# Altium PCB HVPowerModule.PcbDoc (part 2 of 2)
Units mm, origin at the board's own origin, x right, y up, seen from the top; angles counter-clockwise.
Board outline 100 x 60 mm, 2 copper layers (Top Layer, Bottom Layer); 105 components, 66 nets, 450 pads, 567 vias.
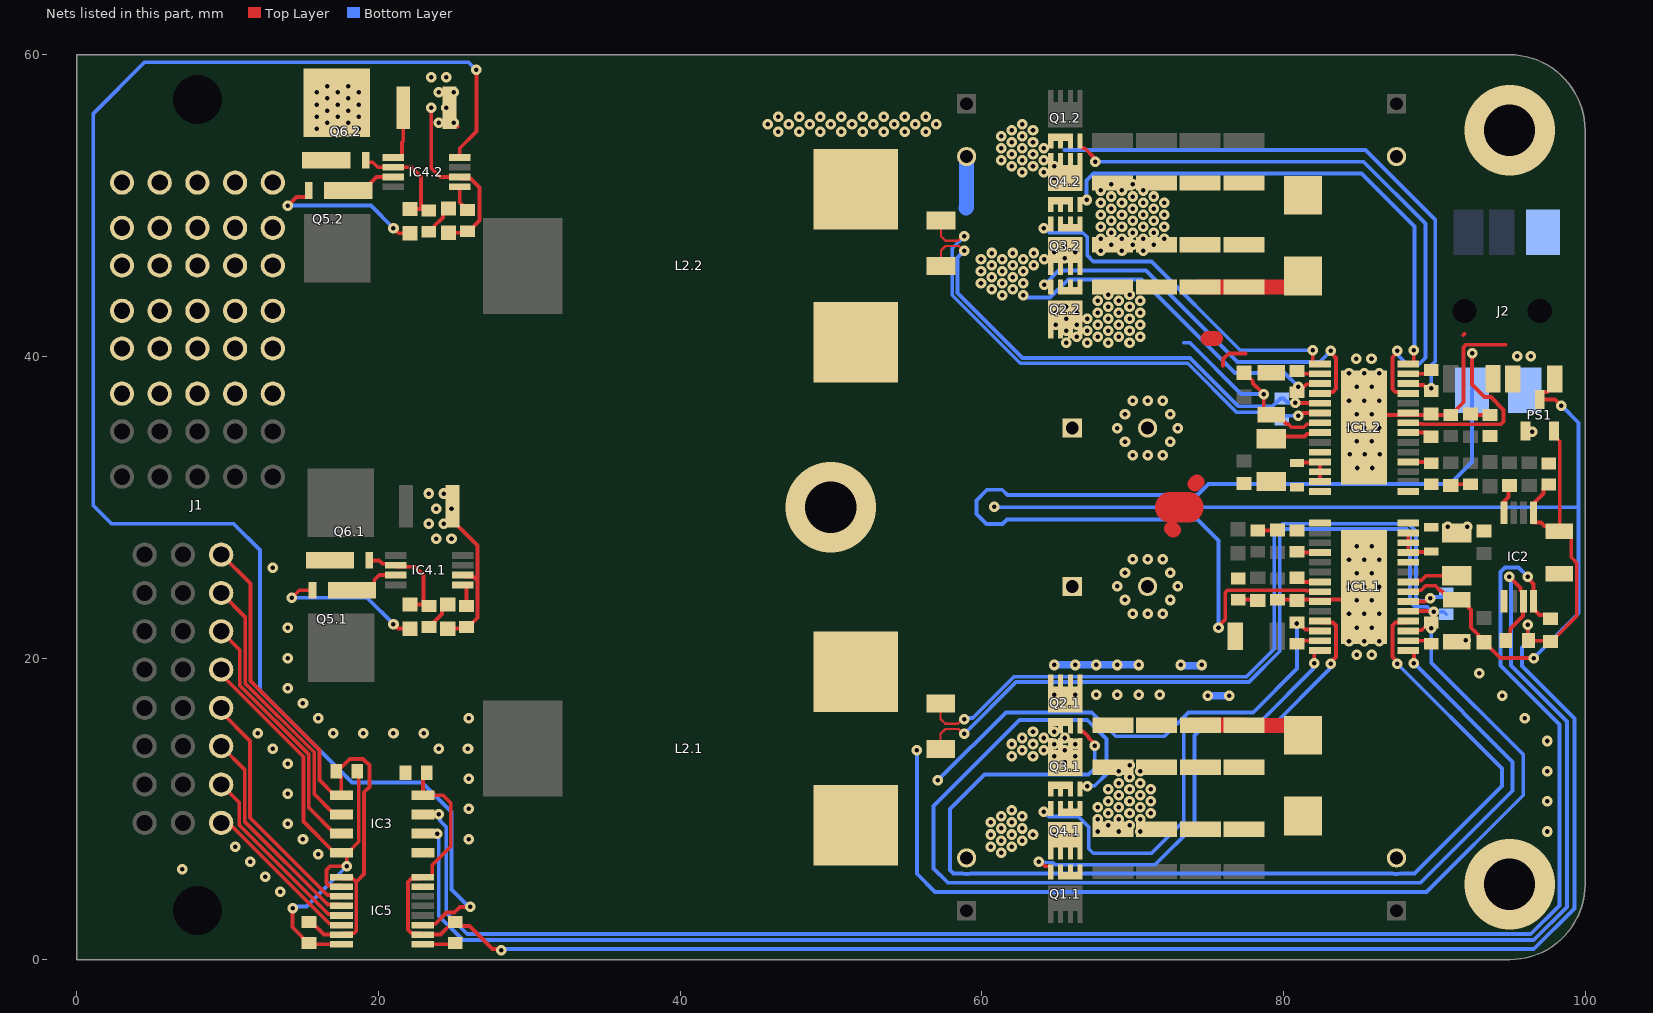
[diagram p2: the nets of this part, all layers, seen from the top]

## Via types
v1: diameter 0.7, hole 0.3, Top Layer to Bottom Layer, 564 vias
v2: diameter 6, hole 3.4, Top Layer to Bottom Layer, 3 vias

## Nets (pads, with @x,y where several pads share a name; then routed paths per layer and width w, separated by ;. In a path a pad name is that pad's centre, name@x,y a point inside that pad or via, vN(x,y) a via of type N, cw(c..) or ccw(c..) an arc to the next point about the centre after c; other vN are vias at no path point) (continued)
24VB_INJ: IC2.4 R10.2 | length 2
  Top Layer w0.254: IC2.4@94.525,29.638 94.623,29.736 94.623,30.37 94.925,30.672 94.925,31.375 R10.2@95,31.45
24VB_OUT: C29.2.2 IC4.2.1 J1.P1 Q6.2.5-6-7-8 | length 3.8
  Top Layer w0.254: IC4.2.1@20.973,53.195 21.46,53.195 21.558,53.293 21.558,54.197 21.645,54.283 C29.2.2@21.645,56.47
  other v1: 15.9,55.1 17.3,55.1 18.7,55.1 16.6,55.5 18,55.5 15.9,55.9 17.3,55.9 18.7,55.9 16.6,56.3 18,56.3 15.9,56.7 17.3,56.7 18.7,56.7 16.6,57.1 18,57.1 15.9,57.5 17.3,57.5 18.7,57.5 16.6,57.9 18,57.9
24VB_SHDN: IC4.2.8 IC5.11 | length 107.4
  Top Layer w0.254: IC5.11@22.95,2.298 23.041,2.389 23.785,2.389 24.515,3.119 25.033,3.119 25.414,3.5 v1(26.1,3.5) ; IC4.2.8@25.397,53.195 25.397,53.801 26.5,54.904 v1(26.5,59)
  Bottom Layer w0.254: v1(26.1,3.5) 26,3.5 24.856,4.644 24.856,9.79 22.896,11.75 18.25,11.75 12.146,17.854 12.146,27.154 10.4,28.9 2.3,28.9 1.1,30.1 1.1,56.1 4.5,59.5 25.966,59.5 26.466,59 v1(26.5,59)
EXT_3V3: C7.1 C32.2 IC3.1 IC5.1 IC5.7 J1.S17 | length 39.7
  Top Layer w0.254: J1.S17@9.58,26.875 11.523,24.932 11.523,18.477 16.1,13.9 16.1,11.906 17.1,10.905 IC3.1@17.538,10.905 17.538,12.162 17.3,12.4 17.3,12.5 18.1,13.3 19,13.3 19.081,13.219 19.085,13.219 19.4,12.904 19.4,11.446 19.054,11.1 19.054,5.677 18.527,5.15 18.529,5.148 18.529,1.901 18.38,1.753 17.641,1.753 IC5.7@17.55,1.662 16.388,1.662 15.6,2.45 C7.1@15.5,2.45 ; IC5.1@17.55,5.472 17.641,5.382 18.298,5.382 18.529,5.15
EXT_GND: C7.2 C32.1 IC3.4 IC5.2 IC5.8 J1.S20 | length 36
  Top Layer w0.254: J1.S20@9.58,19.235 9.58,18.91 15.032,13.458 15.032,9.163 17.1,7.095 IC3.4@17.538,7.095 IC3.4@17.702,7.095 ; v1@14.3,3.4 14.3,2.15 15.5,0.95 C7.2@15.6,0.95 ; C7.2@15.5,1.05 15.522,1.028 IC5.8@17.55,1.028 ; IC5.2@17.55,4.838 17.46,4.929 16.699,4.929 16.55,5.077 16.55,5.95 16.8,6.2 v1(17.9,6.2) 17.9,6.897 IC3.4@17.702,7.095 ; C32.1@18.7,12.4 18.698,12.398 18.698,7.818 17.975,7.095 IC3.4@17.702,7.095
  Bottom Layer w0.254: v1@14.207,3.526 15.226,3.526 v1(17.9,6.2)
  other v1: 14.307,3.426
EXT_SCL: IC3.3 J1.S19 | length 17
  Top Layer w0.254: J1.S19@9.58,21.795 J1.S19@9.58,21.775 10.811,20.544 10.811,18.182 15.388,13.605 15.388,10.077 17.1,8.365 IC3.3@17.538,8.365
EXT_SDA: IC3.2 J1.S18 | length 18.3
  Top Layer w0.254: J1.S18@9.58,24.335 J1.S18@9.58,24.315 11.167,22.728 11.167,18.329 15.744,13.753 15.744,10.991 17.1,9.635 IC3.2@17.538,9.635
GATE1.1: Q5.1.4 R24.1.2 | length 10.3
  Top Layer w0.254: v1(14.25,24) 14.75,24.5 Q5.1.4@15.63,24.5 ; v1(21,22.25) 21.3,21.95 R24.1.2@22.1,21.95
  Bottom Layer w0.254: v1(14.25,24) 19.25,24 v1(21,22.25)
GATE1.2: Q5.2.4 R24.2.2 | length 10.8
  Top Layer w0.254: v1(14,50) 14.577,50.577 15.257,50.577 15.38,50.7 Q5.2.4@15.38,51 ; v1(21,48.5) 21.33,48.17 R24.2.2@22.085,48.17
  Bottom Layer w0.254: v1(14,50) 19.5,50 v1(21,48.5)
GATE2.1: C28.1.2 IC4.1.2 Q6.1.4 R24.1.1 | length 7.3
  Top Layer w0.254: Q6.1.4@19.405,26.475 20.036,26.475 20.263,26.248 21.055,26.248 IC4.1.2@21.153,26.15 21.251,26.052 22.448,26.052 23,25.5 23,23.7 C28.1.2@23.15,23.55 ; R24.1.1@22.1,23.55 C28.1.2@23.15,23.55 ; C28.1.2@23.35,23.45 23.25,23.45 C28.1.2@23.15,23.55
GATE2.2: C28.2.2 IC4.2.2 Q6.2.4 R24.2.1 | length 7.8
  Top Layer w0.254: Q6.2.4@19.155,53.225 Q6.2.4@19.155,52.993 19.278,52.87 19.63,52.87 19.955,52.545 22.205,52.545 22.835,51.915 22.835,49.77 ; R24.2.1@22.085,49.77 22.835,49.77 ; C28.2.2@23.335,49.67 23.235,49.77 22.835,49.77
GND: C1.1.2 C1.2.2 C2.1.1 C2.2.1 C3.1.1 C3.2.1 C4.1.1 C4.2.1 C5.1.1 C5.2.1 C6.1.2 C6.2.2 C8.1.2 C8.2.2 C9.2 C10.1.1 C10.2.1 C11.1 C12.1.1 C12.2.1 C13.1.1 C13.2.1 C14.1 C15.1.2 C15.2.2 C16.1.1 C16.2.1 C19.1.1 C19.2.1 C20.1.1 C20.2.1 C21.1.1 C21.2.1 C22.1.2 C22.2.2 C23.1.2 C23.2.2 C24.1.2 C24.2.2 C25.1 C26.1 C26.1.1 C26.2.1 C27.1.1 C27.2.1 C29.1.1 C29.2.1 C35.1.2 C35.2.2 IC1.1.10 IC1.1.14 IC1.1.15 IC1.1.23 IC1.1.29 IC1.2.10 IC1.2.14 IC1.2.15 IC1.2.23 IC1.2.29 IC2.5 IC3.5 IC4.1.6 IC4.2.6 IC5.9 IC5.15 J1.P2 J2.1 J2.4 PS1.1 Q3.1.5 Q3.1.6 Q3.1.7 Q3.2.5 Q3.2.6 Q3.2.7 Q4.1.5 Q4.1.6 Q4.1.7 Q4.2.5 Q4.2.6 Q4.2.7 R3.2 R5.1.1 R5.2.1 R6.2 R25.1.1 R25.2.1 R30.1.1 R30.2.1 | length 60.6
  Top Layer w0.254: IC5.9@22.95,1.028 24.978,1.028 C9.2@25,1.05 ; v1(23.5,56.5) 23.5,52.5 24.105,51.895 IC4.2.6@25.397,51.895 25.495,51.797 26.104,51.797 26.202,51.699 26.204,51.699 26.338,51.565 26.338,51.562 26.7,51.201 26.7,49 26,48.3 C27.2.1@25.9,48.3 25.8,48.2 R25.2.1@24.65,48.2 ; R25.1.1@24.6,21.95 25.75,21.95 C27.1.1@25.85,22.05 25.95,22.05 26.569,22.669 26.569,23.909 ; C29.2.1@24.725,56.47 24.725,55.52 C29.2.1@24.873,55.372 ; C29.1.1@24.905,30.075 24.905,29.125 26.569,27.461 26.569,25.167 26.569,23.935 ; v1(25,55.5) 25,55.245 25.005,55.25 25.25,55.25 ; IC4.1.6@25.577,25.5 25.675,25.402 26.284,25.402 26.382,25.304 26.384,25.304 26.518,25.17 26.518,25.167 26.544,25.142 ; 76,39.4 76,39.82 76.38,40.2 77.5,40.2 ; C20.1.1@78.3,28.45 79.55,28.45 R3.2@79.6,28.5 ; C19.1.1@79.602,23.873 82.427,23.873 84.502,23.873 v1(85.352,24.723) ; v1(85.352,35.273) 86.202,36.123 88.277,36.123 89.802,36.123 91.202,36.123 91.465,36.386 91.465,36.486 91.939,36.96 91.939,40.596 92.12,40.777 94.723,40.777 ; R6.2@91.1,31.45 91.173,31.523 C20.2.1@92.402,31.523 ; 91.923,41.423 92,41.5
  Top Layer w1: 72.4,29.9 72.5,30 ; 72.6,28.6 72.7,28.5 ; 74.129,31.533 74.262,31.667 ; 75,41.2 75.5,41.2
  Top Layer w2: 72.5,30 73.7,30
  Bottom Layer w0.5: v1@73.217,19.5 v1@74.583,19.5 ; v1@75.092,17.5 v1(76.4,17.5)
  Bottom Layer w1: 58.95,49.83 59,49.88 C6.2.2@59,53.25
  other v1: 13.5,4.5 12.5,5.5 7,6 11.5,6.5 16,7 10.5,7.5 15,8 26,8 67.7,8.5 69.1,8.5 70.5,8.5 97.5,8.5 68.4,8.9 69.8,8.9 14,9 67.7,9.3 69.1,9.3 70.5,9.3 68.4,9.7 69.8,9.7 71.2,9.7 26,10 67.7,10.1 69.1,10.1 70.5,10.1 68.4,10.5 69.8,10.5 71.2,10.5 97.5,10.5 69.1,10.9 70.5,10.9 14,11 68.4,11.3 69.8,11.3 71.2,11.3 69.1,11.7 70.5,11.7 26,12 69.8,12.1 69.1,12.5 70.5,12.5 97.5,12.5 69.8,12.9 14,13 13,14 24,14 25.94,14 97.5,14.5 12,15 17,15 19,15 21,15 23,15 16,16 26,16 96,16 15,17 75,17.5 94.5,17.5 14,18 93,19 73.2,19.541 74.6,19.541 14,20 84.852,20.223 85.852,20.223 84.352,21.123 85.352,21.123 86.352,21.123 92.1,21.178 14,22 84.852,22.023 85.852,22.023 84.352,22.923 85.352,22.923 86.352,22.923 70,22.95 71,22.95 72,22.95 84.852,23.823 85.852,23.823 69.5,23.85 72.5,23.85 84.352,24.723 86.352,24.723 69,24.75 73,24.75 84.852,25.623 85.852,25.623 69.5,25.65 72.5,25.65 13,26 84.352,26.523 85.352,26.523 86.352,26.523 70,26.55 71,26.55 72,26.55 84.852,27.423 85.852,27.423 23.847,27.908 24.847,27.908 90.9,28.7 92.2,28.7 23.347,28.908 24.347,28.908 23.847,29.908 24.847,29.908 23.347,30.908 24.347,30.908 84.9,32.6 85.9,32.6 70,33.45 71,33.45 72,33.45 84.4,33.5 85.4,33.5 86.4,33.5 69.5,34.35 72.5,34.35 84.852,34.373 85.852,34.373 96.5,35 69,35.25 73,35.25 84.352,35.273 86.352,35.273 69.5,36.15 72.5,36.15 84.852,36.173 85.852,36.173 70,37.05 71,37.05 72,37.05 84.352,37.073 85.352,37.073 86.352,37.073 84.852,37.973 85.852,37.973 84.352,38.873 85.352,38.873 86.352,38.873 84.843,39.844 85.843,39.844 95.5,40 96.4,40 67.9,47 69.3,47 70.7,47 68.6,47.4 70,47.4 71.4,47.4 67.9,47.8 69.3,47.8 70.7,47.8 72.1,47.8 68.6,48.2 70,48.2 71.4,48.2 67.9,48.6 69.3,48.6 70.7,48.6 72.1,48.6 68.6,49 70,49 71.4,49 67.9,49.4 69.3,49.4 70.7,49.4 72.1,49.4 68.6,49.8 70,49.8 71.4,49.8 67.9,50.2 69.3,50.2 70.7,50.2 72.1,50.2 68.6,50.6 70,50.6 71.4,50.6 67.9,51 69.3,51 70.7,51 68.6,51.4 70,51.4 24,55.5 24.5,56.5 24,57.5 25,57.5 23.5,58.5 24.5,58.5
  other v2: 95,5 95,55
HDRV1.1: IC1.1.4 Q2.1.8 | length 72
  Top Layer w0.254: Q2.1.8@66.525,15.51 66.525,15.18 66.568,15.137 66.72,15.137 67.08,14.778 67.08,14.715 67.498,14.297 v1(67.498,14.176) ; v1(87.552,19.623) 87.552,19.744 87.225,20.071 87.225,22.158 87.417,22.35 88.179,22.35 IC1.1.4@88.277,22.448
  Bottom Layer w0.254: v1(67.498,14.176) 67.498,12.698 67.077,12.277 60.177,12.277 57.9,10 57.9,5.958 58.066,5.792 58.14,5.718 58.739,5.718 ccw(c59,6.75) 59.261,5.718 87.239,5.718 ccw(c87.5,6.75) 87.761,5.718 88.693,5.718 94.5,11.525 94.5,12.675 v1(87.552,19.623)
HDRV1.2: IC1.2.4 Q2.2.8 | length 26.1
  Top Layer w0.254: IC1.2.4@82.427,37.548 82.525,37.646 83.287,37.646 83.5,37.859 83.5,39.904 83.152,40.252 v1(83.152,40.373)
  Bottom Layer w0.254: v1(64.153,44.754) 65.099,45.7 70.9,45.7 76.968,39.632 82.411,39.632 v1(83.152,40.373)
HDRV2.1: IC1.1.25 Q1.1.8 | length 33.7
  Top Layer w0.254: v1(63.769,6.495) 63.89,6.495 64.192,6.193 64.532,6.193 64.575,6.15 Q1.1.8@64.575,5.82 ; IC1.1.25@82.427,22.448 82.525,22.35 83.287,22.35 83.479,22.158 83.479,20.071 83.152,19.744 v1(83.152,19.623)
  Bottom Layer w0.254: v1(63.769,6.495) 64.627,6.427 64.746,6.427 64.879,6.293 71.493,6.293 74.1,8.9 74.1,14.858 74.642,15.4 79.2,15.4 83.067,19.267 83.067,19.538 v1(83.152,19.623)
HDRV2.2: IC1.2.25 Q1.2.8 | length 40.8
  Top Layer w0.254: Q1.2.8@66.525,54.28 66.525,53.95 66.678,53.797 66.83,53.797 67.44,53.188 67.44,52.985 v1(67.525,52.9) ; v1(87.549,40.373) 87.549,40.252 87.348,40.051 87.348,40.048 87.225,39.925 87.225,37.838 87.417,37.646 88.179,37.646 IC1.2.25@88.277,37.548
  Bottom Layer w0.254: v1(67.525,52.9) 85.325,52.9 89.425,48.8 89.425,39.913 89.01,39.498 88.177,39.498 87.634,40.041 87.634,40.288 v1(87.549,40.373)
LDRV1.1: IC1.1.1 Q3.1.8 | length 76.1
  Top Layer w0.254: IC1.1.1@88.277,20.498 88.553,20.498 88.651,20.4 v1(88.651,19.669)
  Bottom Layer w0.254: v1(67,11.5) 67.032,11.532 67.494,11.532 68.275,12.314 68.275,14.625 67,15.9 62.5,15.9 56.8,10.2 56.8,6.058 57.758,5.1 89.1,5.1 95.2,11.2 95.2,13.12 v1(88.651,19.669)
LDRV1.2: IC1.2.1 Q3.2.8 | length 23.2
  Top Layer w0.254: v1(81.95,40.409) 81.95,39.596 82.048,39.498 IC1.2.1@82.427,39.498
  Bottom Layer w0.254: v1(64.106,48.482) 64.195,48.482 64.477,48.2 66.7,48.2 67.002,47.898 67.002,46.698 67.4,46.3 71.25,46.3 77.141,40.409 v1(81.95,40.409)
LDRV2.1: IC1.1.28 Q4.1.8 | length 30
  Top Layer w0.254: v1(82.053,19.669) 82.053,20.4 82.151,20.498 IC1.1.28@82.427,20.498
  Bottom Layer w0.254: v1(64.1,9.8) 64.172,9.8 64.472,9.5 66.4,9.5 67.1,8.8 67.1,7.355 67.395,7.06 71.26,7.06 73.4,9.2 73.4,15.258 74.042,15.9 78.6,15.9 81.968,19.268 81.968,19.583 v1(82.053,19.669)
LDRV2.2: IC1.2.28 Q4.2.8 | length 34.2
  Top Layer w0.254: IC1.2.28@88.277,39.498 88.652,39.498 88.648,39.502 v1(88.648,40.409)
  Bottom Layer w0.254: v1(66.957,50.37) 66.957,51.657 67.418,52.118 85.182,52.118 88.698,48.602 88.698,40.459 v1(88.648,40.409)
LSN.1: C34.1.1 IC1.1.6 L2.1.2 R1.1.2 | length 50.7
  Top Layer w0.15: R1.1.2@57.275,16.5 57.275,15.963 57.589,15.649 58.434,15.649 58.735,15.95 v1(58.85,15.95)
  Top Layer w0.254: IC1.1.6@88.277,23.748 89.403,23.748 89.625,23.969 v1(89.745,23.969)
  Bottom Layer w0.254: v1(58.85,15.95) 58.935,16.035 59.403,16.035 62.131,18.764 77.564,18.764 79.4,20.6 79.4,28.341 79.961,28.902 88.301,28.902 88.8,28.403 88.8,23.949 88.949,23.8 89.455,23.8 89.692,24.037 90.537,24.037 C34.1.1@90.8,24.3
LSN.2: C34.2.1 IC1.2.6 L2.2.2 R1.2.2 | length 34.8
  Top Layer w0.15: R1.2.2@57.3,48.6 57.3,47.968 57.595,47.673 58.433,47.673 58.735,47.975 v1(58.85,47.975)
  Top Layer w0.254: v1(81,36.077) 81.121,36.077 81.288,36.244 82.235,36.244 82.329,36.15 IC1.2.6@82.427,36.248
  Bottom Layer w0.254: v1(58.85,47.975) 58.044,47.169 58.044,44.053 62.553,39.544 73.656,39.544 76.9,36.3 79.3,36.3 79.8,35.8 C34.2.1@79.9,35.8 80.163,36.063 80.986,36.063 v1(81,36.077)
NetC17.1_1: C17.1.1 IC1.1.2 | length 1.6
  Top Layer w0.254: IC1.1.2@88.277,21.148 89.627,21.148 C17.1.1@89.802,20.973
NetC17.2_1: C17.2.1 IC1.2.2 | length 1.6
  Top Layer w0.254: C17.2.1@80.902,39.023 81.077,38.848 IC1.2.2@82.427,38.848
NetC18.1_2: C18.1.2 IC1.1.27 | length 1.6
  Top Layer w0.254: C18.1.2@80.902,20.973 81.077,21.148 IC1.1.27@82.427,21.148
NetC18.2_2: C18.2.2 IC1.2.27 | length 1.6
  Top Layer w0.254: IC1.2.27@88.277,38.848 89.627,38.848 C18.2.2@89.802,39.023
NetC21.1_2: C21.1.2 R4.1.1 | length 1.3
  Top Layer w0.254: C21.1.2@77.002,23.873 78.252,23.873 R4.1.1@78.302,23.823
NetC21.2_2: C21.2.2 R4.2.1 | length 1.3
  Top Layer w0.254: R4.2.1@92.402,36.173 92.452,36.123 C21.2.2@93.702,36.123
NetC23.1_1: C23.1.1 IC1.1.8 | length 3.4
  Top Layer w0.254: IC1.1.8@88.277,25.048 88.777,25.048 88.875,25.146 89.145,25.146 89.452,25.453 C23.1.1@91.502,25.453
NetC23.2_1: C23.2.1 IC1.2.8 | length 3.4
  Top Layer w0.254: C23.2.1@79.202,34.543 79.359,34.7 81.409,34.7 81.559,34.85 82.329,34.85 IC1.2.8@82.427,34.948
NetC24.1_1: C24.1.1 IC1.1.11 IC1.1.12 IC1.1.13 | length 2.8
  Top Layer w0.254: IC1.1.13@88.277,28.298 IC1.1.12@88.277,27.648 88.277,27.073 88.314,27.036 89.765,27.036 C24.1.1@89.802,27.073
NetC24.2_1: C24.2.1 IC1.2.11 IC1.2.12 IC1.2.13 | length 2.8
  Top Layer w0.254: C24.2.1@80.902,32.923 80.94,32.961 82.39,32.961 82.427,32.923 IC1.2.12@82.427,32.348 IC1.2.13@82.427,31.698
NetC26.1_2: C26.1.2 IC1.1.18 | length 1.6
  Top Layer w0.254: C26.1.2@80.902,27.073 80.977,26.998 IC1.1.18@82.427,26.998
NetC26.2_2: C26.2.2 IC1.2.18 | length 1.6
  Top Layer w0.254: IC1.2.18@88.277,32.998 89.727,32.998 C26.2.2@89.802,32.923
NetC27.1_2: C27.1.2 IC4.1.5 | length 1.6
  Top Layer w0.254: IC4.1.5@25.577,24.85 25.752,24.85 25.85,24.752 C27.1.2@25.85,23.45
NetC27.2_2: C27.2.2 IC4.2.5 | length 1.8
  Top Layer w0.254: IC4.2.5@25.397,51.245 25.397,50.203 25.537,50.063 25.537,49.963 25.8,49.7 C27.2.2@25.9,49.7
NetC28.1_1: C28.1.1 R25.1.2 | length 2.1
  Top Layer w0.254: C28.1.1@23.35,22.05 23.45,22.05 23.713,22.313 23.713,22.413 24.227,22.927 24.227,23.202 24.575,23.55 R25.1.2@24.6,23.55
NetC28.2_1: C28.2.1 R25.2.2 | length 2.1
  Top Layer w0.254: C28.2.1@23.335,48.27 23.435,48.27 23.698,48.533 23.698,48.633 24.277,49.212 24.277,49.452 24.625,49.8 R25.2.2@24.65,49.8
NetIC1.1_21: IC1.1.21 R5.1.2 | length 1.6
  Top Layer w0.254: R5.1.2@80.902,25.323 81.177,25.048 IC1.1.21@82.427,25.048
NetIC1.2_21: IC1.2.21 R5.2.2 | length 1.6
  Top Layer w0.254: IC1.2.21@88.277,34.948 89.527,34.948 R5.2.2@89.802,34.673
NetIC2_7: IC2.7 IC3.6 R19.1 | length 110.5
  Top Layer w0.254: R19.1@94.75,21.15 95.048,21.448 95.048,21.948 95.897,22.797 95.897,23.734 IC2.7@95.925,23.762 95.925,24.275 95.729,24.471 95.729,24.648 v1(94.983,25.394)
  Bottom Layer w0.254: v1(23.915,8.365) 24,8.28 24,2.9 25.6,1.3 96.6,1.3 98.8,3.5 98.8,15.8 95.1,19.5 95.1,25.079 95.062,25.117 95.062,25.315 v1(94.983,25.394)
NetIC2_8: IC2.8 IC3.7 R18.1 | length 111.4
  Top Layer w0.254: v1(96.2,25.4) 96.2,25.279 96.575,24.904 IC2.8@96.575,23.762 96.575,23.249 96.975,22.85 97.45,22.85 R18.1@97.7,22.6
  Bottom Layer w0.254: v1(24,9.635) 24.085,9.55 24.085,9.215 24.5,8.8 24.5,3.1 25.846,1.754 ; 25.9,1.7 96.4,1.7 98.3,3.6 98.3,15.6 94.399,19.501 94.399,25.715 94.684,26 95.6,26 v1(96.2,25.4)
NetIC4.1_3: IC4.1.3 Q5.1.1-2-3 Q6.1.1-2-3 | length 3.5
  Top Layer w0.254: Q5.1.1-2-3@18.25,24.5 19.3,24.5 19.723,24.923 19.723,25.164 20.06,25.5 IC4.1.3@21.153,25.5
NetIC4.2_3: IC4.2.3 Q5.2.1-2-3 Q6.2.1-2-3 | length 3.4
  Top Layer w0.254: Q5.2.1-2-3@18,51 19.05,51 19.473,51.423 19.473,51.489 19.879,51.895 IC4.2.3@20.973,51.895
NetIC5_3: IC5.3 J1.S21 | length 16.3
  Top Layer w0.254: J1.S21@9.58,16.695 9.58,16.42 11.49,14.51 11.49,9.41 16.608,4.293 17.46,4.293 IC5.3@17.55,4.202
NetIC5_4: IC5.4 J1.S22 | length 14.4
  Top Layer w0.254: J1.S22@9.58,14.155 11.134,12.601 11.134,9.166 16.642,3.658 17.46,3.658 IC5.4@17.55,3.568
NetIC5_5: IC5.5 J1.S23 | length 12.4
  Top Layer w0.254: J1.S23@9.58,11.615 10.778,10.417 10.778,8.922 16.678,3.023 17.46,3.023 IC5.5@17.55,2.932
NetIC5_6: IC5.6 J1.S24 | length 10.8
  Top Layer w0.254: J1.S24@9.58,9.075 9.838,8.816 10.335,8.816 16.763,2.389 17.46,2.389 IC5.6@17.55,2.298
SW1.1: C17.1.2 C34.1.2 IC1.1.3 IC1.1.5 Q2.1.5 Q2.1.6 Q2.1.7 Q3.1.1 Q3.1.2 Q3.1.3 Q3.1.4 R1.1.1 | length 118.9
  Top Layer w0.15: R1.1.1@57.275,13.975 57.275,14.976 57.6,15.301 58.465,15.301 58.782,14.984 v1(58.856,14.984)
  Top Layer w0.254: IC1.1.3@88.277,21.798 88.325,21.846 89.175,21.846 89.702,22.373 89.8,22.275 v1(89.8,21.99) ; IC1.1.5@88.277,23.098 88.3,23.121 89.91,23.121 v1(89.965,23.066)
  Bottom Layer w0.254: v1(55.7,13.9) 55.7,5.7 56.9,4.5 89.5,4.5 95.9,10.9 95.9,13.6 89.8,19.7 v1(89.8,21.99) ; v1(58.856,14.984) 62.279,18.408 77.711,18.408 79.756,20.453 79.756,28.193 80.109,28.546 88.154,28.546 88.4,28.3 88.4,23.729 88.729,23.4 89.516,23.4 89.85,23.066 90.634,23.066 C34.1.2@90.8,22.9
  other v1: 65.5,13.1 62,13.5 63.4,13.5 64.8,13.5 66.2,13.5 62.7,13.9 64.1,13.9 65.5,13.9 62,14.3 63.4,14.3 64.8,14.3 66.2,14.3 62.7,14.7 64.1,14.7 65.5,14.7 63.4,15.1 64.8,15.1
SW1.2: C17.2.2 C34.2.2 IC1.2.3 IC1.2.5 Q2.2.5 Q2.2.6 Q2.2.7 Q3.2.1 Q3.2.2 Q3.2.3 Q3.2.4 R1.2.1 | length 56.4
  Top Layer w0.15: 57.3,46.6 57.3,47.026 57.6,47.326 58.493,47.326 58.81,47.009 v1(58.856,47.009)
  Top Layer w0.254: v1(80.794,36.913) 80.802,36.906 82.419,36.906 IC1.2.5@82.427,36.898 ; C17.2.2@80.902,37.623 80.902,37.885 v1(81,37.983) ; C17.2.2@81.002,37.623 81.529,38.15 82.379,38.15 IC1.2.3@82.427,38.198
  Bottom Layer w0.254: v1(58.856,47.009) 58.4,46.554 58.4,44.2 62.7,39.9 73.803,39.9 77.003,36.7 79.3,36.7 79.8,37.2 C34.2.2@79.9,37.2 ; v1@62.753,43.9 64.535,43.9 65.735,45.1 70.6,45.1 76.8,38.9 80.083,38.9 v1(81,37.983) ; C34.2.2@80,37.2 80.263,36.937 80.77,36.937 v1(80.794,36.913)
  other v1: 61.353,44.054 62.753,44.054 60.653,44.454 62.053,44.454 59.953,44.854 61.353,44.854 62.753,44.854 60.653,45.254 62.053,45.254 59.953,45.654 61.353,45.654 62.753,45.654 60.653,46.054 62.053,46.054 63.453,46.054 59.953,46.454 61.353,46.454 62.753,46.454 64.153,46.454 65.5,46.5 60.653,46.854 62.053,46.854 63.453,46.854 64.8,46.9 66.2,46.9 65.5,47.3
SW2.1: C18.1.1 IC1.1.26 L2.1.1 Q1.1.5 Q1.1.6 Q1.1.7 Q4.1.1 Q4.1.2 Q4.1.3 Q4.1.4 | length 32.9
  Top Layer w0.254: v1(80.9,22.29) 80.969,22.29 81.014,22.336 81.454,21.896 82.329,21.896 IC1.1.26@82.427,21.798
  Bottom Layer w0.254: v1@57.108,11.908 61.6,16.4 67.3,16.4 68.889,14.811 72.111,14.811 73.7,16.4 78,16.4 80.9,19.3 v1(80.9,22.29)
  other v1: 61.3,7.1 60.6,7.5 62,7.5 61.3,7.9 62.7,7.9 60.6,8.3 62,8.3 63.4,8.3 64.8,8.3 66.2,8.3 61.3,8.7 62.7,8.7 60.6,9.1 62,9.1 61.3,9.5 62.7,9.5 62,9.9 57.087,11.887
SW2.2: C18.2.1 IC1.2.26 L2.2.1 Q1.2.5 Q1.2.6 Q1.2.7 Q4.2.1 Q4.2.2 Q4.2.3 Q4.2.4 | length 39.6
  Top Layer w0.254: IC1.2.26@88.277,38.198 88.375,38.1 89.3,38.1 89.5,37.9 v1(89.8,37.9) C18.2.1@89.8,37.7
  Bottom Layer w0.254: 65.5,53.677 85.448,53.677 90.075,49.05 90.075,39.674 89.8,39.399 v1(89.8,37.9)
  other v1: 64.8,51.8 62.7,52.2 64.1,52.2 62,52.6 63.4,52.6 64.8,52.6 61.3,53 62.7,53 64.1,53 62,53.4 63.4,53.4 61.3,53.8 62.7,53.8 64.1,53.8 62,54.2 63.4,54.2 61.3,54.6 62.7,54.6 46.5,54.9 47.9,54.9 49.3,54.9 50.7,54.9 52.1,54.9 53.5,54.9 54.9,54.9 56.3,54.9 62,55 63.4,55 45.8,55.4 47.2,55.4 48.6,55.4 50,55.4 51.4,55.4 52.8,55.4 54.2,55.4 55.6,55.4 57,55.4 62.7,55.4 46.5,55.9 47.9,55.9 49.3,55.9 50.7,55.9 52.1,55.9 53.5,55.9 54.9,55.9 56.3,55.9
SYNC: IC1.1.22 IC1.2.22 J2.5 | length 86.1
  Top Layer w0.254: v1(75.7,22) 75.7,22.121 76.145,22.565 76.145,24.343 76.293,24.492 81.482,24.492 81.511,24.463 82.362,24.463 IC1.1.22@82.427,24.398 ; IC1.2.22@88.277,35.598 88.342,35.533 89.193,35.533 89.222,35.504 94.422,35.504 94.6,35.682 94.6,36.456 93.756,37.3 93.333,37.3 92.5,38.133 92.5,40.179 v1(92.518,40.197)
  Bottom Layer w0.254: v1(75.7,22) 75.7,27.8 74.31,29.19 61.687,29.19 61.387,28.89 60.308,28.89 59.644,29.554 59.644,30.447 60.353,31.156 61.363,31.156 61.702,30.817 74.317,30.817 75.033,31.533 91.056,31.533 92.51,32.987 J2.5@92.51,37.755 92.518,37.763 v1(92.518,40.197)
V_IN: C1.1.1 C1.2.1 C2.1.2 C2.2.2 C3.1.2 C3.2.2 C4.1.2 C4.2.2 C5.1.2 C5.2.2 C11.2 C15.1.1 C15.2.1 C22.1.1 C22.2.1 IC1.1.7 IC1.2.7 J1.P3 PS1.3 Q2.1.1 Q2.1.2 Q2.1.3 Q2.1.4 Q2.2.1 Q2.2.2 Q2.2.3 Q2.2.4 R2.1.2 R2.2.2 | length 105.8
  Top Layer w0.254: R2.2.2@77.427,38.923 77.965,38.385 77.965,38.235 v1(78.7,37.5) 78.7,36.506 79.083,36.123 79.602,36.123 80.215,35.51 80.317,35.51 80.527,35.3 81.355,35.3 81.555,35.5 82.329,35.5 IC1.2.7@82.427,35.598 ; IC1.1.7@88.302,24.398 88.4,24.496 89.137,24.496 89.435,24.794 90.079,24.794 90.387,24.486 90.465,24.486 90.695,24.256 91.119,24.256 C22.1.1@91.502,23.873 91.902,23.873 92.285,23.49 92.285,23.342 92.448,23.179 92.448,22.009 92.739,21.718 92.739,21.707 92.927,21.519 92.927,21.398 93.275,21.05 R2.1.2@93.3,21.05 93.325,21.05 94.375,20 v1(96.6,20) ; C11.2@98,38.5 98,38.1 97.617,37.717 97.567,37.717 97.498,37.648 97.198,37.648 97,37.45 PS1.3@97,37.15 98.02,37.15 v1(98.43,36.74)
  Top Layer w1: C3.2.2@74.475,44.6 C2.2.2@77.375,44.6 77.385,44.61 80.582,44.61 C1.2.1@81.3,45.328 ; C4.1.2@74.5,15.55 C5.1.2@77.4,15.55 77.41,15.54 80.632,15.54 C1.1.1@81.3,14.872
  Bottom Layer w0.254: v1(60.831,30.023) 60.854,30 99.573,30 ; 73.4,40.9 73.8,40.9 77.2,37.5 v1(78.7,37.5) ; v1(96.6,20) 99.573,22.973 99.573,30 ; v1(98.43,36.74) 99.573,35.597 99.573,30
  Bottom Layer w0.5: v1(64.8,19.541) v1(66.2,19.541) ; v1@66.223,19.531 66.233,19.541 v1(67.6,19.541) ; v1@67.623,19.531 67.633,19.541 v1(69,19.541) ; v1@69.023,19.531 69.033,19.541 v1(70.4,19.541)
  other v1: 64.8,17.567 66.2,17.567 67.6,17.567 69,17.567 70.4,17.567 71.8,17.567 65.6,40.9 67,40.9 68.4,40.9 69.8,40.9 66.3,41.3 67.7,41.3 69.1,41.3 70.5,41.3 65.6,41.7 67,41.7 68.4,41.7 69.8,41.7 64.9,42.1 66.3,42.1 67.7,42.1 69.1,42.1 70.5,42.1 65.6,42.5 67,42.5 68.4,42.5 69.8,42.5 64.9,42.9 66.3,42.9 67.7,42.9 69.1,42.9 70.5,42.9 65.6,43.3 68.4,43.3 69.8,43.3 67.7,43.7 69.1,43.7 70.5,43.7 68.4,44.1 69.8,44.1
  other v2: 50,30
V_LDO: C9.1 C14.2 C25.2 C26.2 IC2.1 IC3.8 IC5.10 IC5.16 PS1.2 R18.2 R19.2 | length 137.2
  Top Layer w0.254: C26.2@23.005,12.495 C26.2@23.1,12.4 ; C26.2@23.2,12.4 22.962,12.162 IC3.8@22.962,10.905 24.295,10.905 24.8,10.4 24.8,7.5 23.573,6.273 23.573,5.563 23.483,5.472 IC5.16@22.95,5.472 22.859,5.382 22.202,5.382 21.971,5.15 21.971,1.986 22.204,1.753 22.859,1.753 IC5.10@22.95,1.662 24.112,1.662 24.9,2.45 C9.1@25.1,2.45 ; C9.1@25.1,2.5 25.363,2.237 26.039,2.237 27.567,0.708 28.048,0.708 v1(28.134,0.623) ; v1(96.2,22.2) 96.2,21.2 R19.2@96.25,21.15 97.825,21.15 99.456,22.781 99.456,26.31 99.083,26.683 99.083,28.017 98.7,28.4 C14.2@98.3,28.4 98.325,28.425 98.325,34.375 97.95,34.75 PS1.2@97.95,35.05 ; IC2.1@96.475,29.588 96.475,29.075 96.573,28.977 97.086,28.977 97.33,28.733 97.817,28.733 C14.2@98.2,28.35 ; IC2.1@96.475,29.638 96.475,30.151 97.237,30.913 97.237,31.237 97.5,31.5 C25.2@97.6,31.5
  Bottom Layer w0.254: v1(28.134,0.623) 28.211,0.7 96.603,0.7 99.3,3.397 99.3,16 95.823,19.477 95.823,20.69 96.2,21.067 v1(96.2,22.2)
pads on no net: IC1.1.16 IC1.1.17 IC1.2.16 IC1.2.17 IC2.2 IC2.6 IC4.1.7 IC4.2.7 J1.MH1 J1.MH2 J1.S1 J1.S2 J1.S3 J1.S4 J1.S5 J1.S6 J1.S7 J1.S8 J1.S9 J1.S10 J1.S11 J1.S12 J1.S13 J1.S14 J1.S15 J1.S16 J2.2 J2.3 J2.MH1 J2.MH2 L2.1.MP1 L2.2.MP1

## Polygon pours and split planes (outlines as drawn)
GND on Top Layer "GND_L01_P072" (solid, pour order 72): 76.373,40.373 73.4,37.4 73.4,22.6 76.427,19.573 99.7,19.573 99.7,40.373
GND on Top Layer "GND_L01_P061" (solid, pour order 61): 1,29 1,4 4,1 25.94,1 25.94,28.94 26,29
GND on Top Layer "Top Layer-GND" (solid, pour order 88): 64,7 86,7 92.7,0.3 95.287,0.3 99.7,4.713 99.7,19.4 76.3,19.4 73.2,22.5 73.2,37.4 76.3,40.5 99.7,40.5 99.7,55.287 95.287,59.7 92.7,59.7 86,53 64,53 64,46 78,46 80,44 74.8,44 60.8,30 74.909,15.891 79.932,15.932 78,14 64,14
V_IN on Top Layer "V_IN_L01_P065" (solid, pour order 65): 1,42 21,42 28,35 60,35 64,39 64,45 75.8,45 60.8,30 75.8,15 64,15 64,21 60,25 30,25 19,36 1,36
SW1.1 on Top Layer "SW1.1_L01_P024" (solid, pour order 24): 38,25 59,25 64,20 64,17 65,16 67,16 67,13 38,13
GND on Top Layer "GND_L01_P104" (solid, pour order 104): 91,41.3 91,40 99.7,40 99.7,41.3
GND on Top Layer "GND_L01_P105" (solid, pour order 105): 91,19.75 91,18.45 99.7,18.45 99.7,19.75
SW1.2 on Top Layer "SW1.2_L01_P064" (solid, pour order 64): 67,48 60,48 58,46 57,46 55,48 49,48 49,44 49,35 59,35 67,43 67,46
SW2.2 on Top Layer "SW2.2_L01_P063" (solid, pour order 63): 67,48 67,55 65,57 43,57 41,55 41,35 55,35 55,44 49,44 48,45 48,53 49,54 54,54 60,48
24V.1 on Top Layer "24V.1_L01_P036" (solid, pour order 36): 45,6 39,6 38,7 38,25 29,25 25,21 21.436,21 19.69,22.746 19.69,18.445 19.695,18.445 21.14,17 32,17 33,16 33,3 35.7,0.3 45,0.3
LSN.1 on Top Layer "LSN.1_L01_P022" (solid, pour order 22): 58.2,16.4 53.6,21 49,21 49,16.4
LSN.2 on Top Layer "LSN.2_L01_P066" (solid, pour order 66): 49,54 49,48.5 59,48.5 59,54
SW2.1 on Top Layer "SW2.1_L01_P070" (solid, pour order 70): 67,5 67,13 38.5,13 38.5,5
24V.1 on Top Layer "24V.1_L01_P068" (solid, pour order 68): 67,6 44.6,6 44.6,0.3 90.3,0.3 91,1 91,5 90,6
NetIC4.1_3 on Top Layer "NONET_L-01_P-001" (solid, pour order 38): 15.2,27.487 15.2,27.01 15.2,23.4 19.8,23.4 19.8,27.487
24VB_OUT on Top Layer "NONET_L-01_P-001" (solid, pour order 40): 1,47 1,56 4,59 22,59 22,54.987 14.987,54.987 14,54 14,47
24V.2 on Top Layer "24V.2_L01_P062" (solid, pour order 62): 11,49 18,42 21,42 28,35 41,35 41,55 43,57 64,57 67,54 90,54 91,55 91,59 90.3,59.7 35.7,59.7 33,57 33,43 32,42 27,42 20,49
NetIC4.2_3 on Top Layer "NONET_L-01_P-001" (solid, pour order 43): 15,54 15,50 15.05,49.95 20,49.95 20,54
24VA_OUT on Top Layer "NONET_L-01_P-001" (solid, pour order 59): 1,36 1,30 13,30 15,28 22,28 22,32 18,36
GND on Top Layer "NONET_L-01_P-001" (solid, pour order 60): 22.75,59 22.75,55 25.5,55 25.5,59
GND on Top Layer "NONET_L-01_P-001" (solid, pour order 37): 22.75,31.5 22.75,27.5 25.5,27.5 25.5,31.5
GND on Bottom Layer "GND_L02_P082" (solid, remove dead copper, pour order 82): 1,4 4,1 95,1 99,5 99,56 96,59 4,59 1,56
V_IN on Bottom Layer "V_IN_L02_P076" (solid, pour order 76): 63,19 73.4,19 73.4,15.423 63,15.423
SW1.2 on Bottom Layer "SW1.2_L02_P073" (solid, pour order 73): 66.615,47.59 60.394,47.59 59.058,46.254 59.058,43.942 63,40 64,40 64,43 66.615,45.615
V_IN on Bottom Layer "V_IN_L02_P057" (solid, pour order 57): 64,40 64,43 66,45 71,45 74,42 74,40
GND on Bottom Layer "GND_L02_P077" (solid, pour order 77): 1,4 4,1 23.65,1 25.94,3.29 25.94,16.49 15,16.49 15,27.279 13.279,29 1,29
24V.1 on Bottom Layer "Bottom Layer-24V.1" (solid, pour order 92): 48,2 91,2 91,4 57,4 55,6 55,10 53,12 48,12 46,10 46,5 45,4 33.5,4 33,3.5 33,2.5 33.5,2
SW2.2 on Bottom Layer "Bottom Layer-SW2.2" (solid, pour order 54): 59,51 67,51 67,55 64,55 60,59 46,59 44,57 44,40 46,38 55,38 57,40 57,49
24V.2 on Bottom Layer "24V.2_L02_P055" (solid, pour order 55): 60,59 65,54 85,54 86,55 86,58 85,59
24VA_OUT on Bottom Layer "24VA_OUT_L02_P079" (solid, pour order 79): 1,36 1,30 13,30 15,28 22,28 22,32 18,36
24V.1 on Bottom Layer "24V.1_L02_P080" (solid, pour order 80): 15,17 15,27.375 26,27.375 26,17
24V.2 on Bottom Layer "24V.2_L02_P081" (solid, pour order 81): 14.61,44.964 28.5,45.031 28.5,54.5 14.61,54.5
24VB_OUT on Bottom Layer "24VB_OUT_L02_P083" (solid, pour order 83): 1,47 1,56 4,59 22,59 22,54.987 14.987,54.987 14,54 14,47
SW2.1 on Bottom Layer "SW2.1_L02_P085" (solid, pour order 85): 60,6 60,9.385 61.165,10.55 65.35,10.55 67,8.9 67,6
SW1.1 on Bottom Layer "SW1.1_L02_P086" (solid, pour order 86): 61,13 61,16 66.847,16 67,15.847 67,13
SW1.1 on Top Solder (solid): 56,13 66.553,13 66.664,13.111 66.52,13.255 66.52,14.581 66.419,14.581 66,15 66,16 63.7,16 63.7,20.3 63.45,20.55 63,21 58.7,21 56.4,18.7 58.9,18.7 59.637,17.963 59.637,14.782 58.977,14 56,14
no net on Top Solder (solid): 67.4,4.72 67.4,5.9 75.2,5.9 69.8,0.5 67.4,0.5 60.5,0.5 56.28,4.72
no net on Top Solder (solid): 64,57 65.52,55.48 67.357,55.48 67.357,54.3 75.4,54.3 70,59.7 67.357,59.7 58.7,59.7 56,57
no net on Top Solder (solid): 56,41.9 58.7,39.2 63.1,39.2 63.1,46 66.7,46 66.7,47.3 59.7,47.3 59.7,46 56,46
SW2.2 on Top Solder (solid): 56,52 57.7,50.3 58.95,50.3 58.95,49.36 60.31,48 63.038,48 63.038,48.899 63.705,49.566 63.705,51.28 64.5,51.28 64.5,54.5 63.705,55.295 63.705,56.294 56,56.3
V_IN on Top Solder (solid): 67.3,39.2 70,39.2 75.4,44.6 67.3,44.6 67.3,43.39 64.411,43.39 64.411,42.089 64.411,39.2 67.3,39.2
GND on Top Solder (solid): 67.3,47.4 67.3,51.5 78.7,51.5 78.7,47.4
no net on Top Solder (solid): 67.343,12.8 67.343,8.7 78.743,8.7 78.743,12.8
no net on Top Solder (solid): 67.343,21 69.8,21 75.2,15.6 67.343,15.6 67.343,16.81 64.454,16.81 64.454,18.111 64.454,21 67.343,21
SW2.1 on Top Solder (solid): 56,12.3 63.1,12.3 63.105,12.295 63.105,9.31 63.595,8.82 64.499,8.82 64.499,7.501 64.527,7.473 63.506,7.473 62.733,6.7 60.9,6.7 60.9,6.742 59.554,8.087 58.446,8.087 57.058,6.7 56,6.7

## Other copper
Top Layer:
  pour cut-out: 90,40 90,60 91,60 91,40
  pour cut-out: 90,0 90,20 91,20 91,0
Bottom Layer:
  pour cut-out: 84,6 86,8 90,8 90,6
  pour cut-out: 77,40 78,40 78,52.814 77,52.814

## Silkscreen, mask and mechanical layers (free items; w line width, h text height)
Bottom Overlay:
  text "High Voltage Power Module V3.1" at 35,54.501 h4 r90
  text "Designed for Pollux III" at 40,51.501 h3 r90
Top Solder:
  pour cut-out: 59.554,54.588 60.337,53.804 60.337,52.696 59.554,51.912 58.446,51.912 57.662,52.696 57.662,53.804 58.446,54.588 59.176,54.588
  pour cut-out: 57.662,56.294 57.662,55.412 60.337,55.412 60.337,56.294
  text "HVPM V3.1" at 29,29.031 h4
Mechanical 1:
  lines w0.254: 94.987,60 cw(c94.987,54.987) 100,54.987 100,5 cw(c95,5) 95,0 0,0 0,60 95,60